# Altium PCB PCB4.PcbDoc (part 1 of 4)
Units mm, origin at the board's own origin, x right, y up, seen from the top; angles counter-clockwise.
Board outline 297 x 150 mm, 2 copper layers (Top Layer, Bottom Layer); 237 components, 147 nets, 681 pads, 111 vias.
Unrouted connection lines stored in the file: 7.
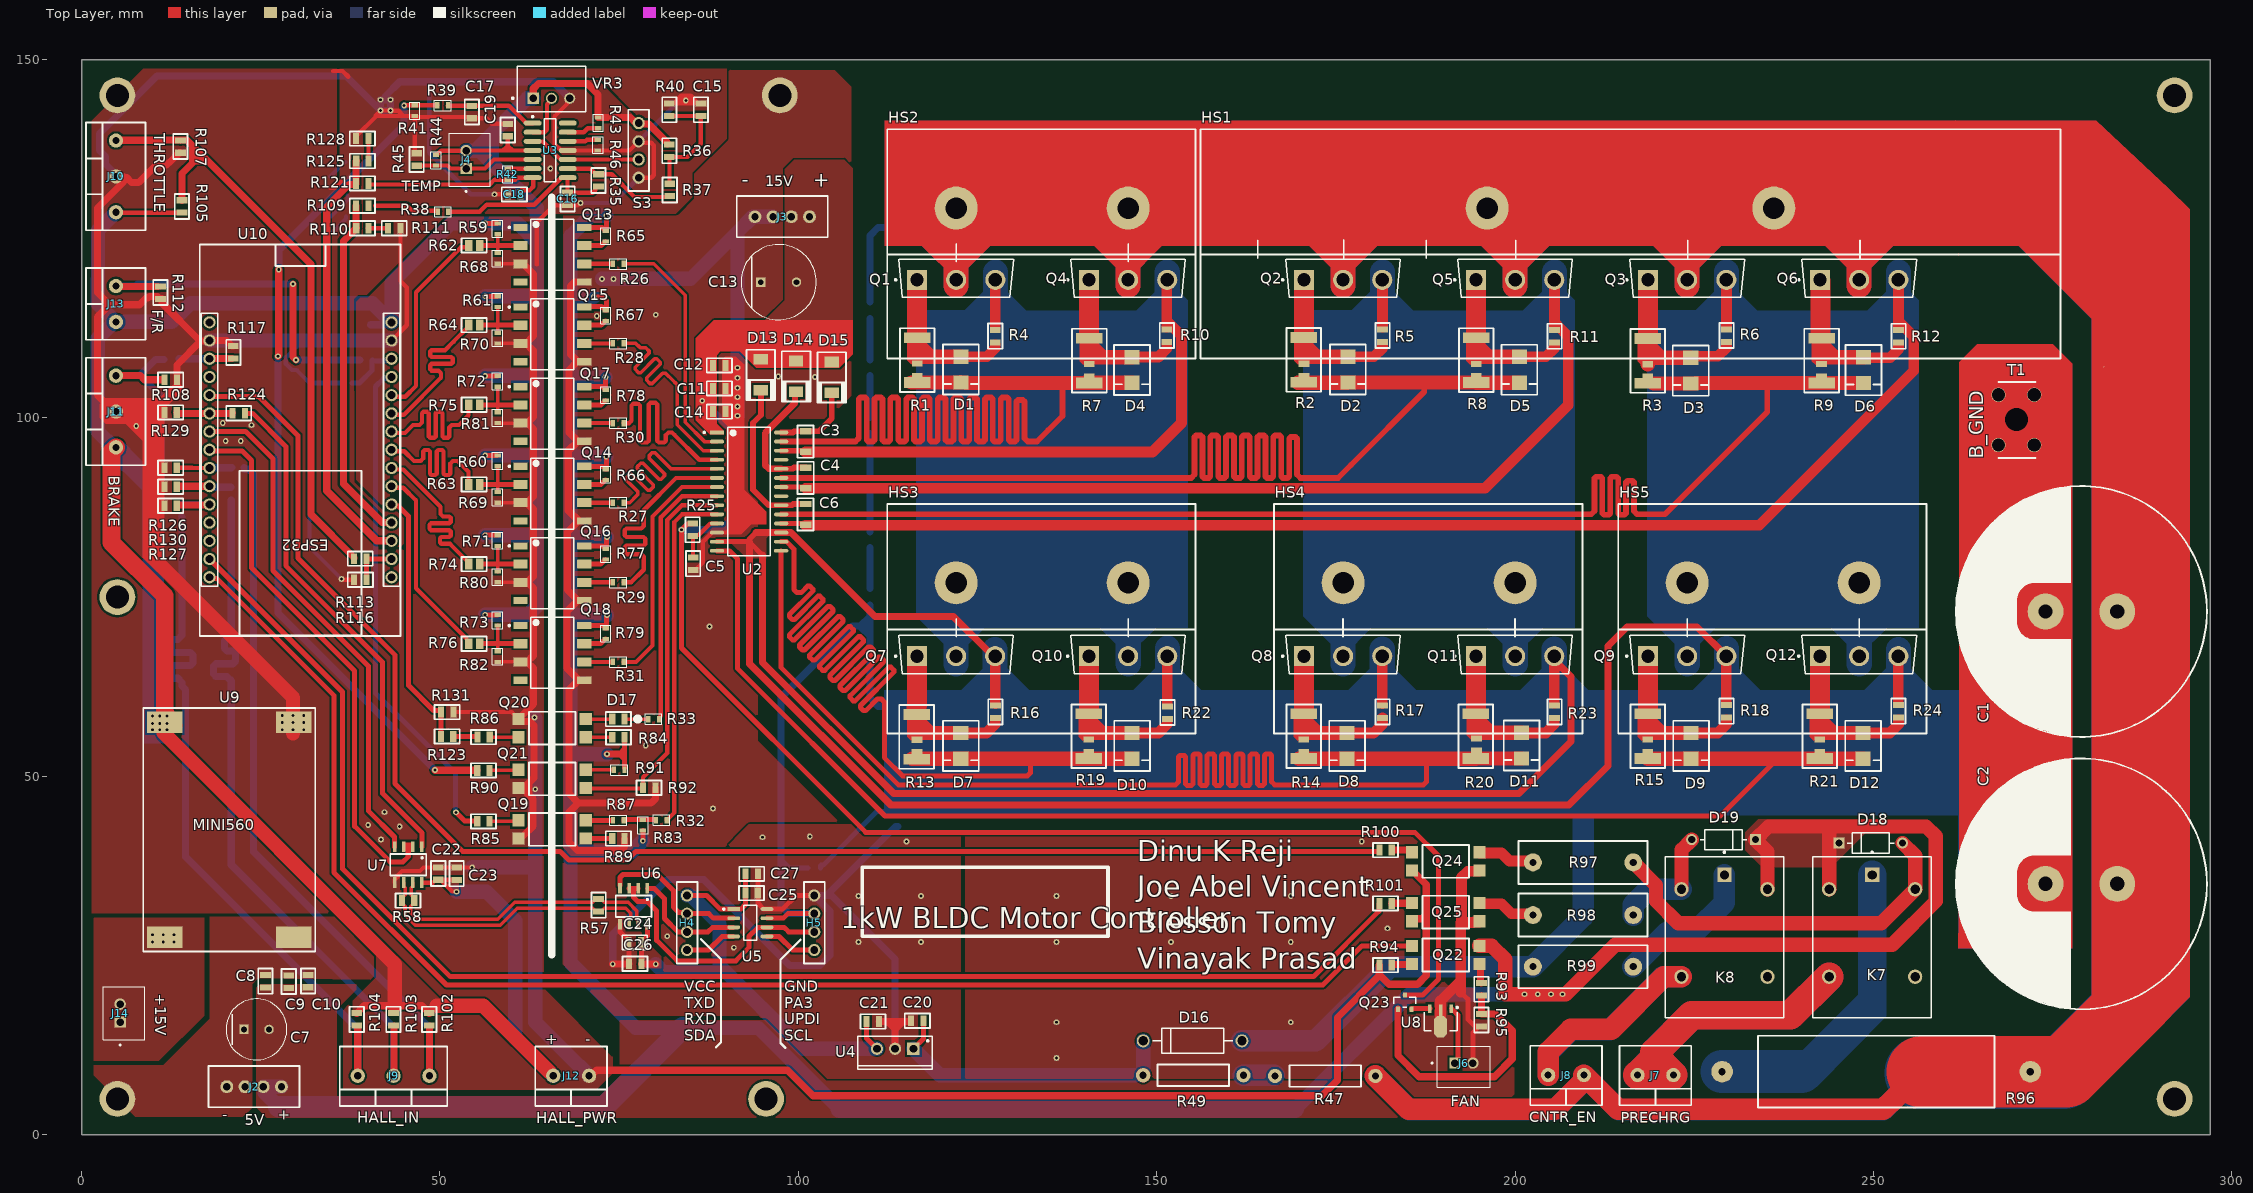
[diagram p0: Top Layer view]
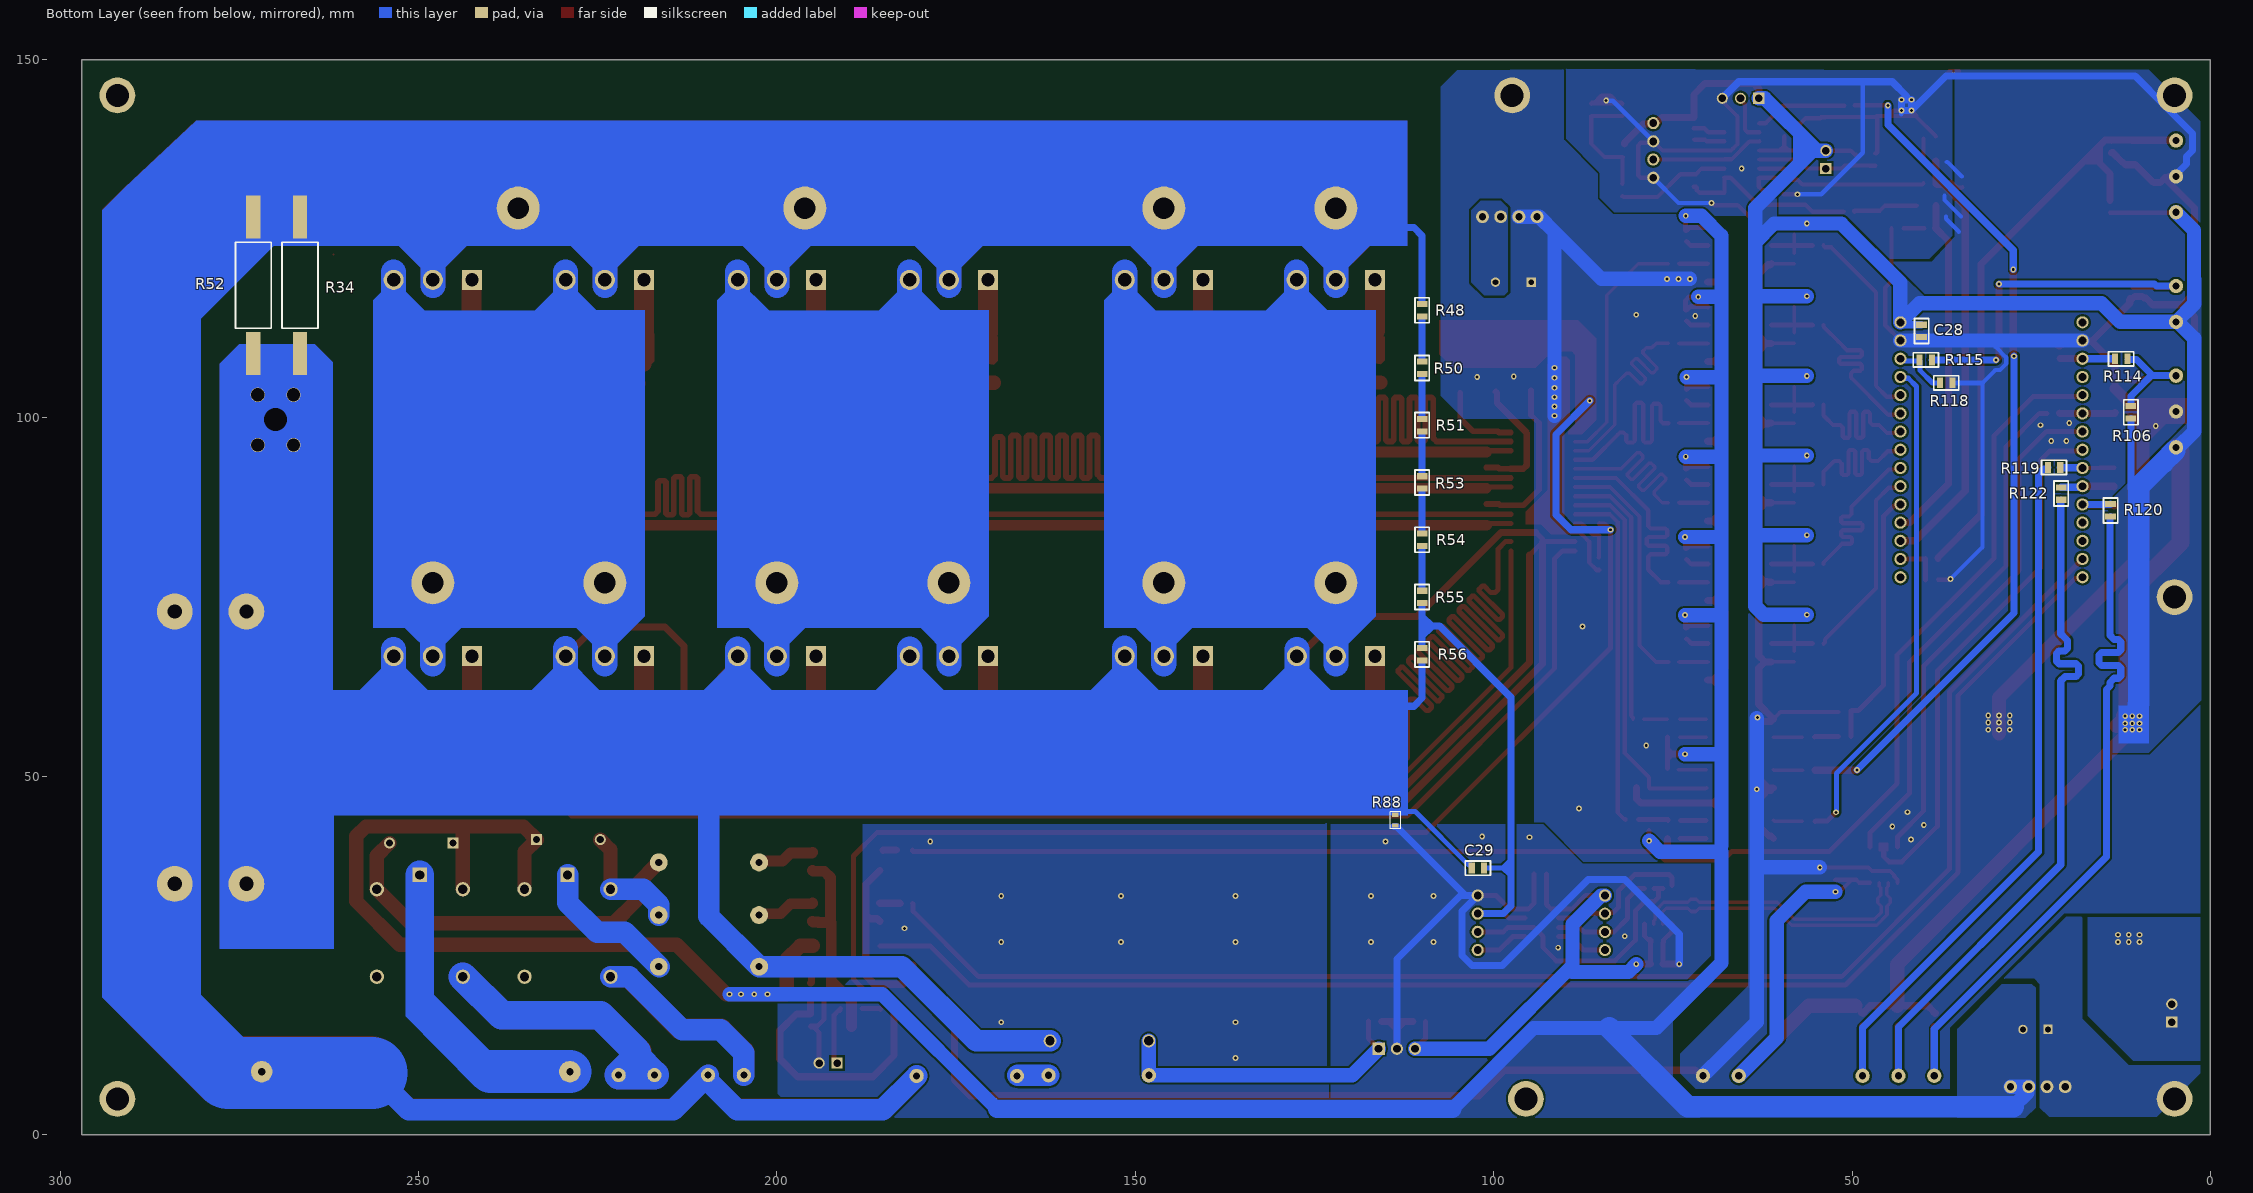
[diagram p1: Bottom Layer view, seen from below]

## Layer stack, top to bottom
Top Solder: solder mask 0.0102, Solder Resist, Dk 3.5
Top Layer: signal copper 0.0356
Dielectric 1: dielectric 0.32, FR-4, Dk 4.8
Bottom Layer: signal copper 0.0356
Bottom Solder: solder mask 0.0102, Solder Resist, Dk 3.5

## Board outline
0,0 0,150 297,150 297,0

## Design rules (kind name [scope] priority, off if disabled: settings)
Clearance [All] p1: gap=0.3 ignorepadtopadclearanceinfootprint=TRUE except(0: Arc-Hole Track-Hole SMDPad-Hole THPad-Hole Via-Hole Fill-Hole Poly-Hole Region-Hole Text-Hole; 0.254: Arc-Text Track-Text SMDPad-SMDPad SMDPad-THPad SMDPad-Via SMDPad-Text THPad-THPad THPad-Via THPad-Text Via-Via Via-Text Fill-Text Poly-Text Region-Text Text-Text)
DiffPairsRouting "Schematic Differential Pairs Routing" [InNetClass('RS485')] p1: maxlimit=0.4 minlimit=0.3 mostfreqgap=0.3 toplayer_minwidth=0.5 toplayer_maxwidth=0.6 toplayer_prefwidth=0.6 bottomlayer_minwidth=0.5 bottomlayer_maxwidth=0.6 bottomlayer_prefwidth=0.6 maxuncoupledlength=2
DiffPairsRouting [All] p2: maxlimit=0.254 minlimit=0.254 mostfreqgap=0.254 toplayer_minwidth=0.381 toplayer_maxwidth=0.381 toplayer_prefwidth=0.381 bottomlayer_minwidth=0.381 bottomlayer_maxwidth=0.381 bottomlayer_prefwidth=0.381 maxuncoupledlength=12.7
MatchedLengths "Schematic Matched Net Lengths_3" [InNetClass('HALL')] p1: tolerance=1 checknetsindiffpair=FALSE checkdiffpairvsdiffpair=TRUE checkxsignals=TRUE checkothers=TRUE
MatchedLengths "Schematic Matched Net Lengths_6" [InNetClass('PWM')] p2: tolerance=1 checknetsindiffpair=FALSE checkdiffpairvsdiffpair=TRUE checkxsignals=TRUE checkothers=TRUE
MatchedLengths "Schematic Matched Net Lengths_2" [InNetClass('PWM_IN')] p3: tolerance=1 checknetsindiffpair=FALSE checkdiffpairvsdiffpair=TRUE checkxsignals=TRUE checkothers=TRUE
MatchedLengths "Schematic Matched Net Lengths_1" [InNetClass('GATE_DRIVE')] p4: tolerance=0 checknetsindiffpair=FALSE checkdiffpairvsdiffpair=TRUE checkxsignals=TRUE checkothers=TRUE
MatchedLengths "Schematic Matched Net Lengths" [InNetClass('PWM_GD')] p5: tolerance=1 checknetsindiffpair=FALSE checkdiffpairvsdiffpair=TRUE checkxsignals=TRUE checkothers=TRUE
PlaneClearance [All] p1: clearance=0.6
PlaneConnect [All] p1: planeconnectstyle=Direct reliefexpansion=0.508 reliefentries=4 reliefconductorwidth=0.254 reliefairgap=0.254
PolygonConnect PolygonConnect_2 [All vs IsNamedPolygon('vcc_15v')] p1: connectstyle=Direct reliefconductorwidth=0.254 reliefentries=4 polygonreliefangle="90 Angle" airgapwidth=0.254
PolygonConnect PolygonConnect_1 [All vs IsNamedPolygon('Bottom Solder-No Net')] p2: connectstyle=Direct reliefconductorwidth=0.254 reliefentries=4 polygonreliefangle="90 Angle" airgapwidth=0.254
PolygonConnect [All] p3: connectstyle=Direct reliefconductorwidth=0.254 reliefentries=4 polygonreliefangle="90 Angle" airgapwidth=0.254
RoutingVias [All] p1: holewidth=0.4 width=0.8 viastyle="Through Hole" minholewidth=0.3 minwidth=0.5 maxholewidth=1 maxwidth=1.27
SolderMaskExpansion [All] p1: expansion=0.102 istentingtop=FALSE
Width [All] p1: maxlimit=10 minlimit=0.5 preferedwidth=1 minimp=50.000000 maximp=50.000000 favimp=50.000000
27 further rules are at their usual default settings.

## Classes and differential pairs
net class RS485: D_N D_P
net class HALL: HALL_1 HALL_2 HALL_3
net class PWM: HIN1_MCU HIN2_MCU HIN3_MCU LIN1_MCU LIN2_MCU LIN3_MCU
net class PWM_IN: HIN1 HIN2 HIN3 LIN1 LIN2 LIN3
net class PWM_GD: HIN1_GD HIN2_GD HIN3_GD LIN1_GD LIN2_GD LIN3_GD
net class GATE_DRIVE: H03 HO1 HO2 LO1 LO2 LO3
differential pair class RS485: D
component class Voltage_measurement: C20 C21 C22 C23 C24 C25 C26 C27 C29 D16 H4 H5 R47 R48 R49 R50 R51 R53 R54 R55 R56 R57 R58 R88 U4 U5 U6 U7
component class "Precharge circuit": D18 D19 J7 J8 J9 J10 J11 J12 J13 K7 K8 Q24 Q25 R96 R97 R98 R99 R100 R101 R102 R103 R104 R105 R106 R107 R108 R112
component class Optocouplers: Q13 Q14 Q15 Q16 Q17 Q18 R59 R60 R61 R62 R63 R64 R65 R66 R67 R68 R69 R70 R71 R72 R73 R74 R75 R76 R77 R78 R79 R80 R81 R82
component class optocouplers2: D17 J6 Q19 Q20 Q21 Q22 Q23 R83 R84 R85 R86 R87 R89 R90 R91 R92 R93 R94 R95 U8
component class mcu: C28 J14 R109 R110 R111 R113 R114 R115 R116 R117 R118 R119 R120 R121 R122 R123 R124 R125 R126 R127 R128 R129 R130 R131 U9 U10
component class HV_Side: C1 C2 D1 D2 D3 D4 D5 D6 D7 D8 D9 D10 D11 D12 HS1 HS2 HS3 HS4 HS5 Q1 Q2 Q3 Q4 Q5 Q6 Q7 Q8 Q9 Q10 Q11 Q12 R1 R2 R3 R4 R5 R6 R7 R8 R9 R10 R11 R12 R13 R14 R15 R16 R17 R18 R19 R20 R21 R22 R23 R24 R34 R52 T1
component class Gate_Driver: C3 C4 C5 C6 C7 C8 C9 C10 C11 C12 C13 C14 D13 D14 D15 J2 J3 R25 R26 R27 R28 R29 R30 R31 R32 R33 U2
component class Current_measurement: C15 C16 C17 C18 C19 J4 R35 R36 R37 R38 R39 R40 R41 R42 R43 R44 R45 R46 S3 U3 VR3
differential pair D: +D_P -D_N

## Components (designator, comment, footprint, x,y, rotation, side; value= is the part's Value field where it differs from the comment)
C1 "4700uF 100V" "4700uF 100V" 284,73 r180 top
C2 "4700uF 100V" "4700uF 100V" 284,35 r180 top
C3 "0.1uF 1206" C1206 101,96.71 r270 top
C4 "0.1uF 1206" C1206 101.025,91.63 r270 top
C5 "1uF 0805" R0805 85.325,79.675 r270 top
C6 "0.1uF 1206" C1206 101,86.55 r270 top
C7 "100uF 50v" FP-EEU-FR1H101B-MFG 24.4,14.7 r0 top
C8 "10uF 0805" R0805 25.65,21.425 r90 top
C9 "0.1uF 0805" R0805 28.9,21.375 r90 top
C10 "0.01uF 0805" R0805 31.6,21.45 r90 top
C11 "0.1uF 0805" R0805 88.975,104.112 r180 top
C12 "10uF 0805" R0805 88.975,107.325 r0 top
C13 "10uf THT" FP-RAD-TH-D_10_0_5-L_20_2-MFG 97.25,118.95 r0 top
C14 "0.01uF 0805" R0805 88.975,100.9 r0 top
C15 "0.01uF 0805" R0805 86.4,143 r90 top
C16 "0.1uF 0805" R0805 67.8,130.55 r270 top
C17 "0.1uF 0805" R0805 54.45,142.675 r270 top
C18 "0.1uF 0805" R0805 60.375,131.2 r180 top
C19 "0.01uF 0805" R0805 59.45,140.175 r90 top
C20 "0.33uF 0805" R0805 116.6,15.9 r180 top
C21 "0.1uF 0805" R0805 110.4,15.8 r0 top
C22 "0.01uF 0805" R0805 49.75,36.45 r90 top
C23 "0.1uF 0805" R0805 52.325,36.425 r90 top
C24 "0.01uF 0805" R0805 77.175,26.825 r180 top
C25 "0.01uF 0805" R0805 93.475,33.725 r0 top
C26 "0.1uF 0805" R0805 77.225,23.85 r180 top
C27 "0.1uF 0805" R0805 93.5,36.4 r0 top
C28 "10uF 0805" R0805 40.3,112.125 r270 bottom
C29 "0.01uF 0805" R0805 102.2,37.2 r0 bottom
D1 "SS34" DO-214AC 122.675,104.952 r90 top
D2 "SS34" DO-214AC 176.657,104.952 r90 top
D3 "SS34" DO-214AC 224.5,104.8 r90 top
D4 "SS34" DO-214AC 146.549,104.893 r90 top
D5 "SS34" DO-214AC 200.577,104.927 r90 top
D6 "SS34" DO-214AC 248.602,104.877 r90 top
D7 "SS34" DO-214AC 122.657,52.452 r90 top
D8 "SS34" DO-214AC 176.559,52.452 r90 top
D9 "SS34" DO-214AC 224.559,52.452 r90 top
D10 "SS34" DO-214AC 146.559,52.452 r90 top
D11 "SS34" DO-214AC 200.9,52.5 r90 top
D12 "SS34" DO-214AC 248.559,52.452 r90 top
D13 "SS510" DO-210AA 94.75,106.025 r90 top
D14 "SS510" DO-210AA 99.675,105.8 r90 top
D15 "SS510" DO-210AA 104.65,105.675 r90 top
D16 "1N5347BRLG" ONSC-SURMETIC40-2-017AA-01 155,13.1 r0 top
D17 "LED-0805" LED0805 74.9,57.995 r180 top
D18 "1N4007" FP-1N4007-MFG 249.6,40.7 r0 top value=15pF
D19 "1N4007" FP-1N4007-MFG 229.075,41.175 r180 top value=15pF
H4 "2.54mm 4p header" "2.54mm 4p header" 84.475,29.575 r0 top
H5 "2.54mm 4p header" "2.54mm 4p header" 102.225,29.58 r0 top
HS1 "Heatsink_L" heatsink_l 156.093,122.761 r0 top locked
HS2 "heatsink_S" haetsink_s 122.018,129.286 r180 top locked
HS3 "heatsink_S" haetsink_s 122.018,77 r180 top locked
HS4 "heatsink_S" haetsink_s 176,77 r180 top locked
HS5 "heatsink_S" haetsink_s 224,77 r180 top locked
J2 "5V" "JST PH-4A" 24.07,6.7 r180 top
J3 "PH-4A" "JST PH-4A" 97.745,128.075 r180 top
J4 "10k NTC" XH2.5-2p 53.667,134.78 r270 top
J6 "FAN" XH2.5-2p 191.58,9.983 r180 top
J7 "PRECHRG" TERMINAL_5MM_2P 219.575,8.325 r180 top
J8 "CNTR_EN" TERMINAL_5MM_2P 207.1,8.325 r180 top
J9 "HALL_IN" TERMINAL_5MM_3P 43.525,8.225 r180 top
J10 "THROTTLE" TERMINAL_5MM_3P 4.8,133.7 r90 top
J11 "BRAKE" TERMINAL_5MM_3P 4.8,100.9 r90 top
J12 "HALL_PWR" TERMINAL_5MM_2P 68.3,8.225 r180 top
J13 "F/R" TERMINAL_5MM_2P 4.8,115.9 r90 top
J14 "15V_VCC" XH2.5-2p 5.4,15.7 r270 top
K7 "5v/10A spdt" FP-G5LE-1-E-36-DC5-MFG 249.8,27.55 r90 top
K8 "5v/10A spdt" FP-G5LE-1-E-36-DC5-MFG 229.2,27.55 r90 top
Q1 "IRFP260NPBF" FP-PG-TO247-3-MFG 122.018,119.5 r90 top
Q2 "IRFP260NPBF" FP-PG-TO247-3-MFG 176,119.5 r90 top
Q3 "IRFP260NPBF" FP-PG-TO247-3-MFG 224,119.5 r90 top
Q4 "IRFP260NPBF" FP-PG-TO247-3-MFG 146,119.5 r90 top
Q5 "IRFP260NPBF" FP-PG-TO247-3-MFG 200,119.5 r90 top
Q6 "IRFP260NPBF" FP-PG-TO247-3-MFG 248,119.5 r90 top
Q7 "IRFP260NPBF" FP-PG-TO247-3-MFG 122,67 r90 top
Q8 "IRFP260NPBF" FP-PG-TO247-3-MFG 176,67 r90 top
Q9 "IRFP260NPBF" FP-PG-TO247-3-MFG 224,67 r90 top
Q10 "IRFP260NPBF" FP-PG-TO247-3-MFG 146,67 r90 top
Q11 "IRFP260NPBF" FP-PG-TO247-3-MFG 200,67 r90 top
Q12 "IRFP260NPBF" FP-PG-TO247-3-MFG 248,67 r90 top
Q13 "6N137-300E" FP-6N137-300E-MFG 65.675,122.777 r270 top
Q14 "6N137-300E" FP-6N137-300E-MFG 65.675,89.45 r270 top
Q15 "6N137-300E" FP-6N137-300E-MFG 65.675,111.668 r270 top
Q16 "6N137-300E" FP-6N137-300E-MFG 65.675,78.341 r270 top
Q17 "6N137-300E" FP-6N137-300E-MFG 65.675,100.559 r270 top
Q18 "6N137-300E" FP-6N137-300E-MFG 65.675,67.232 r270 top
Q19 "EL817S1" EL817S1 65.65,42.6 r0 top
Q20 "EL817S1" EL817S1 65.65,56.725 r180 top
Q21 "EL817S1" EL817S1 65.65,49.65 r0 top
Q22 "EL817S1" EL817S1 190.325,25.075 r0 top
Q23 "SI2300DS-T1-GE3" FP-S-03946-MFG 184.6,18.5 r90 top
Q24 "EL817S1" EL817S1 190.325,38.15 r0 top
Q25 "EL817S1" EL817S1 190.325,31.05 r0 top
R1 "1k 2512" R2512 116.586,108.077 r90 top
R2 "1k 2512" R2512 170.5,108.1 r90 top
R3 "1k 2512" R2512 218.5,107.975 r90 top
R4 "10k 0805" R0805 127.478,111.416 r90 top
R5 "10k 0805" R0805 181.5,111.5 r90 top
R6 "10k 0805" R0805 229.5,111.5 r90 top
R7 "1k 2512" R2512 140.6,108 r90 top
R8 "1k 2512" R2512 194.564,108.077 r90 top
R9 "1k 2512" R2512 242.75,108 r90 top
R10 "10k 0805" R0805 151.411,111.491 r90 top
R11 "10k 0805" R0805 205.5,111.4 r90 top
R12 "10k 0805" R0805 253.5,111.4 r90 top
R13 "1k 2512" R2512 116.5,55.5 r90 top
R14 "1k 2512" R2512 170.5,55.6 r90 top
R15 "1k 2512" R2512 218.5,55.6 r90 top
R16 "10k 0805" R0805 127.5,59 r90 top
R17 "10k 0805" R0805 181.5,59 r90 top
R18 "10k 0805" R0805 229.5,59.1 r90 top
R19 "1k 2512" R2512 140.5,55.6 r90 top
R20 "1k 2512" R2512 194.5,55.6 r90 top
R21 "1k 2512" R2512 242.5,55.6 r90 top
R22 "10k 0805" R0805 151.5,58.9 r90 top
R23 "10k 0805" R0805 205.5,59 r90 top
R24 "10k 0805" R0805 253.475,59.1 r90 top
R25 "1K 0805" R0805 85.25,84.405 r270 top
R26 "0R 0603" R0603 74.875,121.507 r0 top
R27 "0R 0603" R0603 74.875,88.18 r0 top
R28 "0R 0603" R0603 74.875,110.398 r0 top
R29 "0R 0603" R0603 74.875,77.071 r0 top
R30 "0R 0603" R0603 74.875,99.289 r0 top
R31 "0R 0603" R0603 74.875,65.962 r0 top
R32 "0R 0603" R0603 80.9,43.9 r0 top
R33 "0R 0603" R0603 79.8,57.995 r0 top
R34 "Bleeder" "1W Modified THT" 266.519,118.514 r0 bottom
R35 "3k 0805" R0805 72.1,133.125 r270 top
R36 "12k 0805" R0805 82,137.275 r90 top
R37 "20k 0805" R0805 82.05,131.8 r270 top
R38 "0R 0603" R0603 50.425,128.775 r180 top
R39 "0R 0603" R0603 50.375,143.6 r180 top
R40 "10k 0805" R0805 82,143 r270 top
R41 "0R 0603" R0603 46.475,142.875 r90 top
R42 "0R 0603" R0603 59.45,134 r270 top
R43 "0R 0603" R0603 72.075,141.175 r90 top
R44 "0R 0603" R0603 49.45,135.975 r90 top
R45 "10k 0805" R0805 46.75,136.05 r270 top
R46 "0R 0603" R0603 72.025,138.075 r270 top
R47 "100R 1W THT" "1W THT" 173.5,8.2 r180 top
R48 "20k 0805" R0805 109.975,115.025 r90 bottom
R49 "100R 1W THT" "1W THT" 155.1,8.3 r0 top
R50 "20k 0805" R0805 109.975,106.983 r270 bottom
R51 "20k 0805" R0805 109.975,98.992 r90 bottom
R52 "Bleeder" "1W Modified THT" 273.044,118.514 r0 bottom
R53 "20k 0805" R0805 109.975,91 r270 bottom
R54 "10k 0805" R0805 109.975,83.008 r270 bottom
R55 "5.1k 0805" R0805 109.975,75.017 r270 bottom
R56 "5.1k 0805" R0805 109.975,67.025 r90 bottom
R57 "120R 0805" R0805 72.125,32.025 r90 top
R58 "120R 0805" R0805 45.55,32.675 r0 top
R59 "0R 0603" R0603 58.05,126.375 r90 top
R60 "0R 0603" R0603 58.05,94.01 r90 top
R61 "0R 0603" R0603 58.05,116.228 r90 top
R62 "180R 0402" R08050402 54.759,124.077 r0 top
R63 "180R 0402" R08050402 54.759,90.732 r0 top
R64 "180R 0402" R08050402 54.759,112.962 r0 top
R65 "0R 0603" R0603 73.125,125.377 r90 top
R66 "0R 0603" R0603 73.125,92.107 r90 top
R67 "0R 0603" R0603 73.125,114.287 r90 top
R68 "0R 0603" R0603 58.05,122.257 r90 top
R69 "0R 0603" R0603 58.05,88.93 r90 top
R70 "0R 0603" R0603 58.05,111.148 r90 top
R71 "0R 0603" R0603 58.05,82.901 r90 top
R72 "0R 0603" R0603 58.05,105.119 r90 top
R73 "0R 0603" R0603 58.05,71.792 r90 top
R74 "180R 0402" R08050402 54.759,79.617 r0 top
R75 "180R 0402" R08050402 54.759,101.847 r0 top
R76 "180R 0402" R08050402 54.759,68.502 r0 top
R77 "0R 0603" R0603 73.125,81.017 r90 top
R78 "0R 0603" R0603 73.125,103.197 r90 top
R79 "0R 0603" R0603 73.125,69.927 r90 top
R80 "0R 0603" R0603 58.05,77.821 r90 top
R81 "0R 0603" R0603 58.05,100.039 r90 top
R82 "0R 0603" R0603 58.05,66.712 r90 top
R83 "0R 0603" R0603 78.3,43.2 r270 top
R84 "10k 0805" R0805 74.909,55.455 r0 top
R85 "100R 0805" R0805 56.075,43.725 r0 top
R86 "150R 0805" R0805 56.075,55.475 r180 top
R87 "0R 0603" R0603 74.891,43.87 r0 top
R88 "R0603" R0603 113.7,43.9 r270 bottom
R89 "200R 0805" R0805 74.891,41.33 r180 top
R90 "100R 0805" R0805 56.075,50.825 r0 top
R91 "0R 0603" R0603 75,50.9 r0 top
R92 "200R 0805" R0805 79.175,48.4 r180 top
R93 "1K 0805" R0805 195.3,20.3 r270 top
R94 "100R 0805" R0805 181.925,23.675 r0 top
R95 "10k 0805" R0805 195.3,16 r90 top
R96 "10k 10W THT" R10W 250.375,8.8 r0 top
R97 "220R 1W THT" R1WTHT 209.475,38 r0 top
R98 "220R 1W THT" R1WTHT 209.475,30.65 r0 top
R99 "220R 1W THT" R1WTHT 209.475,23.45 r0 top
R100 "100R 0805" R0805 181.925,39.725 r0 top
R101 "100R 0805" R0805 181.925,32.275 r0 top
R102 "10k 0805" R0805 48.5,16.1 r90 top
R103 "10k 0805" R0805 43.5,16.1 r90 top
R104 "10k 0805" R0805 38.4,16.1 r90 top
R105 "10k 0805" R0805 14,129.5 r270 top
R106 "10k 0805" R0805 11.1,100.8 r270 bottom
R107 "10k 0805" R0805 13.8,137.875 r90 top
R108 "10k 0805" R0805 12.425,105.325 r180 top
R109 "3.3k 0805" R0805 39.175,129.6 r0 top
R110 "3.3k 0805" R0805 39.175,126.475 r180 top
R111 "3.3k 0805" R0805 43.625,126.475 r180 top
R112 "10k 0805" R0805 11,117.5 r90 top
R113 "3.3k 0805" R0805 38.875,80.375 r180 top
R114 "3.3k 0805" R0805 12.45,108.25 r180 bottom
R115 "3.3k 0805" R0805 39.7,108.1 r180 bottom
R116 "3.3k 0805" R0805 38.893,77.425 r0 top
R117 "3.3k 0805" R0805 21.175,109.15 r270 top
R118 "3.3k 0805" R0805 36.85,104.9 r0 bottom
R119 "10k 0805" R0805 21.825,93.1 r0 bottom
R120 "10k 0805" R0805 13.925,87.1 r270 bottom
R121 "3.3k 0805" R0805 39.175,132.725 r0 top
R122 "10k 0805" R0805 20.825,89.45 r270 bottom
R123 "3.3k 0805" R0805 51,55.575 r0 top
R124 "1K 0805" R0805 21.925,100.65 r0 top
R125 "3.3k 0805" R0805 39.175,135.85 r180 top
R126 "10k 0805" R0805 12.425,93.05 r0 top
R127 "10k 0805" R0805 12.425,87.75 r0 top
R128 "3.3k 0805" R0805 39.175,138.975 r0 top
R129 "1K 0805" R0805 12.425,100.775 r0 top
R130 "10k 0805" R0805 12.425,90.4 r0 top
R131 "3.3k 0805" R0805 51,58.975 r180 top
S3 "WCS1600" "2.54mm 4p header" 77.725,137.325 r0 top
T1 "B_GND" "7701 Terminal" 269.925,99.725 r0 top
U2 "IR2136SPBF" FP-PG-DSO-28-IPC_C 93.125,89.725 r0 top
U3 "MCP6004-I/SL" SOIC-SL14_M 65.375,137.325 r0 top
U4 "L7805CV" TO220 113.5,12 r180 top
U5 "ATTINY402-SSNR" FP-C04-057-SWB-IPC_C 93.3,29.575 r0 top
U6 "TP8485" TP8485 77.025,31.875 r180 top
U7 "TP8485" TP8485 45.575,37.675 r180 top
U8 "L78L12A" SOT-89_L 189.6,15.9 r270 top
U9 "MINI560" MINI560 20.6,42.55 r90 top
U10 "ESP32" esp32 30.55,95.56 r180 top locked
VR3 "10k pot" BOUR-3299W-3_V 65.56,145.89 r0 top

## Footprints (in the part's own frame and the unit in brackets; to place one, negate y for a bottom-side part, rotate by r counter-clockwise, add the part's x,y. Pads: shape width x height; smd on the part's side, far side on the other; paste and mask are expansions set on the pad)
"1W Modified THT" [mm]
  rect 2x6 smd: 1(0,9.5) 2(0,-9.5)
  silkscreen extent -2.5,-6 2.5,6
"1W THT" [mm]
  round 2 hole 1: 1(-7,0) 2(7,0)
  silkscreen extent -5,-1.5 5,1.5
"2.54mm 4p header" [mm]
  round 1.7 hole 1.1: 1(0,3.81) 2(0,1.27) 3(0,-1.27) 4(0,-3.81)
  silkscreen extent -1.45,-5.68 1.45,5.68
"4700uF 100V" [mm]
  round 5 hole 2: 1(0,0) 2(10,0)
  silkscreen extent -12.5,-17.5 22.5,17.5
"7701 Terminal" [mm]
  round 2 hole 1.85: 1(-2.5,-3.5) 1(2.5,-3.5) 1(2.5,3.5)
  round 2 hole 1.85 paste+0 mask+0.102: 1(-2.5,3.5)
  round 1.524 hole 3.2: 1(0.025,0.05)
  Top Layer region: -4,-5 4,-5 4,5 -4,5
  Bottom Layer region: -4,-5 4,-5 4,5 -4,5
  silkscreen extent -2.5,-5.3 2.65,5.3
BOUR-3299W-3_V [mm] "TH, 3-Leads, Body 9.53x6.4mm, Pitch 2.54mm"
  rect 1.55x1.55 hole 1.05: 1(-2.54,-1.29)
  round 1.55 hole 1.05: 2(0,-1.29) 3(2.54,-1.29)
  silkscreen extent -5.54,-3.2 4.76,3.2, body extent -4.76,-3.2 4.76,3.2, height 11.55
C1206 [mm] "1206 Package"
  rect 0.9x1.6 smd: 1(-1.45,0) 2(1.45,0)
  silkscreen extent -2.25,-1.12 2.25,1.13
DO-210AA [mm] "DO-210AA Package"
  rect 1.5x2 smd: 1(-2.15,0) 2(2.15,0)
  silkscreen extent -3.5,-2 3.5,2
DO-214AC [mm] "SMA"
  rect 2x2.1 smd: 1(0,0) 2(3.6,0)
  silkscreen extent -1.7,-2.5 5.3,2.5
EL817S1 [mm] "Optocoupler"
  rect 1.68x1.71 smd: 1(-4.69,1.27) 2(-4.69,-1.27) 3(4.69,-1.27) 4(4.69,1.27)
  silkscreen extent -3.25,-2.29 3.25,2.29
esp32 [mm]
  round 1.7 hole 1.1: 1(-12.7,17.78) 2(-12.7,15.24) 3(-12.7,12.7) 4(-12.7,10.16) 5(-12.7,7.62) 6(-12.7,5.08) 7(-12.7,2.54) 8(-12.7,0) 9(-12.7,-2.54) 10(-12.7,-5.08) 11(-12.7,-7.62) 12(-12.7,-10.16) 13(-12.7,-12.7) 14(-12.7,-15.24) 15(-12.7,-17.78) 16(12.7,-17.78) 17(12.7,-15.24) 18(12.7,-12.7) 19(12.7,-10.16) 20(12.7,-7.62) 21(12.7,-5.08) 22(12.7,-2.54) 23(12.7,0) 24(12.7,2.54) 25(12.7,5.08) 26(12.7,7.62) 27(12.7,10.16) 28(12.7,12.7) 29(12.7,15.24) 30(12.7,17.78)
  silkscreen extent -13.92,-28.65 14.08,25.98
FP-1N4007-MFG [mm]
  rect 1.55x1.55 hole 1 paste-1000 mask+0: 1(-4.44,0)
  round 1.55 hole 1 paste-1000 mask+0: 2(4.44,0)
  silkscreen extent -3.26,-1.4 3.26,1.4, body extent -5.32,-1.5 5.32,1.5, height 0.25
FP-6N137-300E-MFG [mm]
  rect 1.016x2 smd paste+0 mask+0: 1(-3.81,-4.45) 4(3.81,-4.45) 5(3.81,4.45) 8(-3.81,4.45)
  rect 1.27x2 smd paste+0 mask+0: 2(-1.27,-4.45) 3(1.27,-4.45) 6(1.27,4.45) 7(-1.27,4.45)
  silkscreen extent -4.95,-6.12 4.95,3, body extent -5.05,-5.55 5.05,5.55, height 0.25
FP-C04-057-SWB-IPC_C [mm]
  rect 1.777x0.542 smd paste+0 mask+0: 1(-2.318,1.905)
  rrect100% 1.777x0.542 smd paste+0 mask+0: 2(-2.318,0.635) 3(-2.318,-0.635) 4(-2.318,-1.905) 5(2.318,-1.905) 6(2.318,-0.635) 7(2.318,0.635) 8(2.318,1.905)
  silkscreen extent -3.83,-2.45 0.93,2.45, body extent -3.31,-2.55 3.31,2.55, height 0.25
FP-EEU-FR1H101B-MFG [mm]
  rect 1.3x1.3 hole 0.8 paste-1000 mask+0: 1(-1.75,0)
  round 1.3 hole 0.8 paste-1000 mask+0: 2(1.75,0)
  silkscreen extent -4.25,-4.25 4.25,4.25, body extent -4.35,-4.35 4.35,4.35, height 0.25
FP-G5LE-1-E-36-DC5-MFG [mm]
  rect 2x2 hole 1.3 paste-1000 mask+0: 1(8.7,0)
  round 2 hole 1.3 paste-1000 mask+0: 2(6.7,6) 3(-5.5,6) 4(-5.5,-6) 5(6.7,-6)
  silkscreen extent -11.25,-8.25 11.97,8.25, body extent -11.35,-8.35 11.35,8.35, height 0.25
FP-PG-DSO-28-IPC_C [mm]
  rect 1.998x0.527 smd paste+0 mask+0: 1(-4.478,8.255)
  rrect100% 1.998x0.527 smd paste+0 mask+0: 2(-4.478,6.985) 3(-4.478,5.715) 4(-4.478,4.445) 5(-4.478,3.175) 6(-4.478,1.905) 7(-4.478,0.635) 8(-4.478,-0.635) 9(-4.478,-1.905) 10(-4.478,-3.175) 11(-4.478,-4.445) 12(-4.478,-5.715) 13(-4.478,-6.985) 14(-4.478,-8.255) 15(4.478,-8.255) 16(4.478,-6.985) 17(4.478,-5.715) 18(4.478,-4.445) 19(4.478,-3.175) 20(4.478,-1.905) 21(4.478,-0.635) 22(4.478,0.635) 23(4.478,1.905) 24(4.478,3.175) 25(4.478,4.445) 26(4.478,5.715) 27(4.478,6.985) 28(4.478,8.255)
  silkscreen extent -6.38,-8.95 2.98,8.95, body extent -5.58,-9.05 5.58,9.05, height 0.25
FP-PG-TO247-3-MFG [mm]
  rect 2.8x2.8 hole 1.85 paste-1000 mask+0: 1(-0.228,5.46)
  round 2.8 hole 1.85 paste-1000 mask+0: 2(-0.228,0) 3(-0.228,-5.46)
  silkscreen extent -2.66,-8 2.66,8.56, body extent -2.76,-8.16 2.76,8.16, height 0.25
FP-RAD-TH-D_10_0_5-L_20_2-MFG [mm]
  rect 1.3x1.3 hole 0.8 paste-1000 mask+0: 1(-2.5,0)
  round 1.3 hole 0.8 paste-1000 mask+0: 2(2.5,0)
  silkscreen extent -5.25,-5.25 5.25,5.25, body extent -5.35,-5.35 5.35,5.35, height 0.25
FP-S-03946-MFG [mil]
  rect 29x22 smd paste+0 mask+0: 1(-39,37.5) 2(-39,-37.5) 3(39,0)
  silkscreen extent -28,-60 28,60, body extent -57,-64 57,64, height 10
haetsink_s [mm]
  round 6 hole 3: 1(-24,0) 1(0,0)
  silkscreen extent -33.38,-11 9.62,21
heatsink_l [mm]
  round 6 hole 3: 1(40,6.525) 1(80,6.525)
  Top Layer lines w0.254: 105.75,0.05 105.8,0.05
  silkscreen extent 0,-14.47 120,17.53
"JST PH-4A" [mm]
  round 1.8 hole 1: 1(-3.81,0) 2(-1.27,0) 3(1.27,0) 4(3.81,0)
  silkscreen extent -6.35,-2.88 6.35,2.88
LED0805 [mm] "LED 0805 Package"
  rect 0.85x1.5 smd: 1(-0.866,0) 2(0.866,0)
  silkscreen extent -2.82,-1 1.76,1
MINI560 [mm]
  rect 3x5 smd: 1(-15,9) 2(-15,-9) 3(15,9) 4(15,-9)
  silkscreen extent -17,-12 17,12
ONSC-SURMETIC40-2-017AA-01 [mm] "AXIAL, 2-Leads, Diameter 3.49mm"
  round 1.8 hole 1.3: 1(-6.887,0) 2(6.887,0)
  silkscreen extent -5.59,-1.75 5.59,1.75
R1WTHT [mm] "1Watt THT Resistor"
  round 2.5 hole 1: 1(-7,0) 2(7,0)
  silkscreen extent -9,-3 9,3
R10W [mm]
  round 3 hole 1: 1(-21.5,0) 2(21.5,0)
  silkscreen extent -16.5,-5 16.5,5
R0603 [mm] "0603 Package"
  rect 0.6x0.9 smd mask+0.102: 1(-0.75,0) 2(0.75,0)
  silkscreen extent -1.17,-0.72 1.18,0.72
R0805 [mm] "0805 Package"
  rect 0.85x1.5 smd: 1(-0.875,0) 2(0.857,0)
  silkscreen extent -1.75,-1 1.75,1
R2512 [mm] "2512 Package"
  rect 1.5x3.7 smd: 1(-3.125,0) 2(3.125,0)
  silkscreen extent -4.44,-2.41 4.44,2.41
R08050402 [mm] "MOdified 0805"
  rect 1.05x1.5 smd: 1(-0.766,0) 2(0.766,0)
  silkscreen extent -1.74,-1 1.76,1
SOIC-SL14_M [mm] "SOIC, 14-Leads, Body 8.7x3.9mm, Pitch 1.27mm, IPC Low Density"
  oval 2.5x0.7 smd: 1(-2.45,3.81) 2(-2.45,2.54) 3(-2.45,1.27) 4(-2.45,0) 5(-2.45,-1.27) 6(-2.45,-2.54) 7(-2.45,-3.81) 8(2.45,-3.81) 9(2.45,-2.54) 10(2.45,-1.27) 11(2.45,0) 12(2.45,1.27) 13(2.45,2.54) 14(2.45,3.81)
  silkscreen extent -2.57,-4.4 0.8,4.83, body extent -2,-4.38 2,4.38, height 1.75
SOT-89_L [mm] "SOT89, 3-Leads, Body 4.5x2.4 mm, Pitch 1.5mm, Lead Span 4.1mm, IPC High Density"
  rect 1.2x0.5 smd: 1(-1.7,1.5) 3(-1.7,-1.5)
  rect 1.6x0.5 smd: 2(-1.5,0)
  oct 3x1.8 smd: 2(0.8,0)
  silkscreen extent -1.97,-2.3 1.4,2.43, body extent -1.2,-2.3 1.4,2.3, height 1.6
TERMINAL_5MM_2P [mm] "5mm screw terminal"
  round 2 hole 1: 1(2.5,0) 2(-2.5,0)
  silkscreen extent -5,-4.1 5,4.2
TERMINAL_5MM_3P [mm] "5mm screw terminal"
  round 2 hole 1: 1(5,0) 2(0,0) 2(0,0) 3(-5,0)
  silkscreen extent -7.5,-4.1 7.5,4.2
TO220 [mm] "TO, Thru-Hole, Vertical, Heatsink Mounted; 3 In-Line Leads; Pitch 2.54 mm"
  rect 1.7x1.7 hole 1.1: 1(-2.54,0)
  round 1.7 hole 1.1: 2(0,0) 3(2.54,0)
  silkscreen extent -5.2,-1.75 5.2,2.85, body extent -5.25,-1.8 5.25,2.9, height 19.7
TP8485 [mm]
  rect 0.5x1.5 smd: 1(-1.905,-2.5) 2(-0.635,-2.5) 3(0.635,-2.5) 4(1.905,-2.5) 5(1.905,2.5) 6(0.635,2.5) 7(-0.635,2.5) 8(-1.905,2.5)
  silkscreen extent -2.5,-1.5 2.5,1.5
XH2.5-2p [mm]
  rect 1.575x1.575 / inner round 1.575 / far side rect 1.575x1.575 hole 1.05: 1(-0.02,-0.017)
  round 1.575 hole 1.05: 2(-2.52,-0.017)
  silkscreen extent -4.97,-2.37 3.27,3.38, body extent -4.97,-2.37 2.43,3.38, height 7

## Part data
C1 C2: "4700uF 100V Electrolytic Capacitor", ComponentLink1Description="Product URL", ComponentLink1URL=https://sharvielectronics.com/product/4700uf-100v-electrolytic-capacitor/, ComponentLink2Description=Datasheet, Price per piece=185
C3 C4 C6: "0.1uF/100nF 50V Capacitor ±10% Tolerance CC1206KRX7R9BB104 – 1206 Package", Datasheet=https://sharvielectronics.com/wp-content/uploads/2020/09/Yageo-smd-Capacitor.pdf, Price per piece=2.22, Product URL=https://sharvielectronics.com/product/0-1uf-100nf-50v-capacitor-%c2%b110-tolerance-cc1206krx7r9bb104-1206-package/
C5: "1uF/1000nF 50V Capacitor ±10% Tolerance CC0805KKX7R9BB105 – 0805 Package", Datasheet=https://drive.google.com/file/d/1wr2K_YaGqgMtACeU2pC6RWLSxDMrIPxr/view?usp=sharing, Price per piece=2.16, Product URL=https://sharvielectronics.com/product/1uf-1000nf-50v-capacitor-%c2%b110-tolerance-cc0805kkx7r9bb105-0805-package/
C7: library part CMP-05427-000020-1, "100uF 50V Electrolytic Capacitor – JWCO", Capacitance=100uF, Case/Package=Radial, ESR (Equivalent Series Resistance)=61mR, Max Operating Temperature=105°C, Min Operating Temperature=-40°C, Package Quantity=1, Ripple Current=870mA, Tolerance=20%, Voltage Rating=50V, Contact Plating=Tin, Datasheet=https://drive.google.com/file/d/1y5PJPaMvWZ3P4wiieSg8-_Hf04MAZeNc/view?usp=sharing, Diameter=8mm, Features="General Purpose", Height=11.5mm, Height - Seated (Max)=0.512inch, Impedance=61mR, Lead Diameter=0.6mm, Lead Free="Lead Free", Lead Pitch=5mm, Length=11.5mm, Life (Hours)=6000Hour, Mount="Through Hole", Packaging="Tape and Reel", Price per piece=4.75, Product URL=https://sharvielectronics.com/product/100uf-50v-electrolytic-capacitor-jwco/, Radiation Hardening=No, REACH SVHC="No SVHC", RoHS Compliant=Yes, Series=FR, Termination=Radial, Voltage Rating (DC)=50V
C8 C12 C28: "10uF/1000nF 50V Capacitor ±10% Tolerance CC0805KKX5R9BB106 – 0805 Package", Datasheet=https://drive.google.com/file/d/1wr2K_YaGqgMtACeU2pC6RWLSxDMrIPxr/view?usp=sharing, Price per piece=2.85, Product URL=https://sharvielectronics.com/product/10uf-1000nf-50v-capacitor-%c2%b110-tolerance-cc0805kkx5r9bb106-0805-package/
C9 C11 C16 C17 C18 C21 C23 C26 C27: "0.1uF/100nF 100V Capacitor ±10% Tolerance CC0805KKX7R0BB104 – 0805 Package", Datasheet=https://drive.google.com/file/d/1wr2K_YaGqgMtACeU2pC6RWLSxDMrIPxr/view?usp=sharing, Price per piece=4.76, Product URL=https://sharvielectronics.com/product/0-1uf-100nf-100v-capacitor-%c2%b110-tolerance-cc0805kkx7r0bb104-0805-package/
C10 C14 C15 C19 C22 C24 C25 C29: "10nF/0.01uF 50V Capacitor ±10% Tolerance 0805B103K500CT – 0805 Package", Datasheet=https://drive.google.com/file/d/18RHnvRuuuVekgJyOA4l8O3UUaSpuKbHR/view?usp=sharing, Price per piece=2.45, Product URL=https://sharvielectronics.com/product/10nf-0-01uf-50v-capacitor-%c2%b110-tolerance-0805b103k500ct-0805-package/
C13: library part CMP-05427-000384-1, "Aluminum Electrolytic Capacitors (Radial Lead Type) 10uF ±20% 350V", Capacitance=10uF, Case/Package=Radial, Max Operating Temperature=105°C, Min Operating Temperature=-25°C, Package Quantity=200, Ripple Current=82mA, Tolerance=20%, Voltage Rating=350V, Construction=RADIAL, Contact Plating=Tin, Datasheet=https://drive.google.com/file/d/1s8SUY3P6K0bBIcG8WC2zo0Wz7jUZ4bD_/view?usp=sharing, Diameter=10mm, Height=20mm, Height - Seated (Max)=0.866inch, Lead Diameter=0.6mm, Lead Pitch=5mm, Lead/Base Style=Straight, Length=20mm, Life (Hours)=2000Hour, Mount="Through Hole", Packaging=Bulk, Price per piece=2.25, Product URL=https://sharvielectronics.com/product/10uf-35v-electrolytic-capacitor-105c-5x11mm-samwha/, Radiation Hardening=No, REACH SVHC="No SVHC", Ripple Current (AC)=82mA, RoHS Compliant=Yes, Series=NHG, Termination=Radial, Voltage Rating (DC)=350V
C20: library part "0.1uF 0805", "0.33uF/330nF 50V Capacitor ±10% Tolerance CC0805KKX7R9BB334 – 0805 Package", Datasheet=https://drive.google.com/file/d/1wr2K_YaGqgMtACeU2pC6RWLSxDMrIPxr/view?usp=sharing, Price per piece=2.78, Product URL=https://sharvielectronics.com/product/0-33uf-330nf-50v-capacitor-%C2%B110-tolerance-cc0805kkx7r9bb334-0805-package/
D1 D2 D3 D4 D5 D6 D7 D8 D9 D10 D11 D12: "SS34 SMA 40V/3A Schottky Diode SMD Package-DO-214AC", Forward Current=3A, Manufacturer="Vishay Semiconductors", Manufacturer Part Number=SS34-E3/57T, Max Junction Temp=+150°C, Max Repetitive Reverse Voltage=40V, Max Surge Forward Current=100A, Package=95402, Peak Reverse Current=0.5mA, Temperature="-55°C to +150°C", Temperature Range Low=-55°C, Automotive=No, Category=Diode, ComponentLink2Description=Datasheet, ComponentLink2URL=http://www.vishay.com/docs/88751/ss32.pdf, Datasheet=https://drive.google.com/file/d/1NCTjjzsUDglehHYd-VxKcrmaXziByLRA/view?usp=sharing, Device Class L1="Discrete Semiconductors", Device Class L2=Diodes, Device Class L3="Schottky Diodes", Digikey Description="DIODE SCHOTTKY 40V 3A DO214AB", Footprint Url=http://www.vishay.com/docs/95402/smc.pdf, Height=2.62mm, Lead Free=Yes, Mouser Description="Schottky Diodes & Rectifiers 3.0 Amp 40 Volt", Octopart=https://octopart.com/ss34-e3%2F57t-vishay-39552907, Price per piece=5.75, Product URL=https://sharvielectronics.com/product/ss34-sma-40v-3a-schottky-diode-smd-package-do-214ac/, RoHS=TRUE, Standoff Height=0mm, Temperature Range High=+150°C
D13 D14 D15: "SS510-E3/52T – 100V 5A High Voltage Schottky Diode – DO-214AA Package", Datasheet=https://drive.google.com/file/d/1iz5AYn44Er0kaCDKeIane-7fZ44xILG8/view?usp=sharing, Price per piece=12.75, Product URL=https://sharvielectronics.com/product/ss510-e3-52t-100v-5a-high-voltage-schottky-diode-do-214aa-package/
D16: library part CMP-1060-01277-1, "5 W Zener Voltage Regulator, 2-Pin Surmetic(TM) 40, Pb-Free, Tape and Reel", Manufacturer="On Semiconductor", ComponentLink1Description="Manufacturer URL", ComponentLink1URL=http://www.onsemi.com/, ComponentLink2Description=Datasheet, ComponentLink2URL=http://www.onsemi.cn/pub_link/Collateral/1N5333B-D.PDF, ComponentLink3Description="Package Specification", ComponentLink3URL=http://www.onsemi.cn/pub_link/Collateral/017AA.PDF, Datasheet=https://drive.google.com/file/d/1Ga-c_Md0AeMcY8wCGBIrhHknR-aAM12m/view?usp=sharing, DatasheetVersion="Rev. 14", Mounting Technology="Through Hole", P Max (W)=5, PackageDescription="2-Pin, Axial Lead, Diameter 3.49 mm", PackageReference=SURMETIC40-2-017AA-01, PackageVersion="Rev. O, 09/2005", Packing="Tape and Reel", PartNumber=1N5347BRLG, Price per piece=16.89, Product URL=https://sharvielectronics.com/product/1n5347b-10v-5-watt-zener-diode-do-35-package/, RoHS=Pb-Free, VZ Typ (V)=10
D17: "Red LED – 0805 SMD Package – 17-21SURC/S530-A3/TR8", Datasheet=https://drive.google.com/file/d/193qGY45iPx2JlzACJk7ZLn2axHlG04VY/view?usp=sharing, Price per piece=2.32, Product URL=https://sharvielectronics.com/product/red-led-0805-smd-package-17-21surc-s530-a3-tr8/
D18 D19: library part CMP-123542-000001-1, "GOOD-ARK 1N4007 General Purpose Rectifier Diode – DO-41 Package", Capacitance=15pF, Forward Current=1A, Manufacturer=Diotec, Max Junction Temp=+175°C, Max Repetitive Reverse Voltage=1000V, Max Surge Forward Current=27A, Peak Reverse Current=5uA, Temperature="-50°C to +175°C", Temperature Range Low=-50°C, Automotive=No, Category=Diode, ComponentLink2Description=Datasheet, ComponentLink2URL=https://datasheet.octopart.com/1N4007-Diotec-datasheet-62346875.pdf, Datasheet=https://sharvielectronics.com/wp-content/uploads/2020/02/1N4007-Diode-Good-Ark.pdf, Device Class L1="Discrete Semiconductors", Device Class L2=Diodes, Device Class L3="Rectifier Diodes", Height=2.8mm, Ipc Land Pattern Name=DIOAD888W100L520D280, Lead Free=Yes, Manufacturer Part Number=1N4007, Octopart=https://octopart.com/1n4007-diotec-4040411, Package=1N4007, Price per piece=1.29, Product URL=https://sharvielectronics.com/product/good-ark-1n4007-general-purpose-rectifier-diode-do-41-package/, Reverse Voltage=1000V, RoHS=TRUE, Temperature Range High=+175°C
J2 J3: library part "4 Pin JST PH-4A", "4 Pin JST PH-4A Straight Male Connector – 2mm Pitch", Datasheet=https://drive.google.com/file/d/1xtnH8dmm313gQd5L_EWqAXCnKwT4okMA/view?usp=sharing, Price per piece=3.55, Product URL=https://sharvielectronics.com/product/4-pin-jst-ph-4a-straight-male-connector-2mm-pitch/
J4 J6 J14: library part XH2.5-2p, "2 Pin JST-XH Male Straight 2515 Connector 2.54mm Pitch", Datasheet=https://sharvielectronics.com/wp-content/uploads/2021/01/XH-Connector.pdf, Price per piece=1.65, Product URL=https://sharvielectronics.com/product/2-pin-jst-xh-male-straight-2515-connector-2-54mm-pitch/
J7 J8 J12 J13: library part "2p 5mm screw terminal", "XY127- 2 Pin Screw Terminal- 5mm Pitch", Datasheet=https://sharvielectronics.com/wp-content/uploads/2023/03/XY127.pdf, Price per piece=6.32, Product URL=https://sharvielectronics.com/product/2-pin-screw-terminal-block-red-5mm-pitch/
J9 J10 J11: library part "3p 5mm screw terminal", "XY127- 3 Pin Screw Terminal- 5mm Pitch", Datasheet=https://sharvielectronics.com/wp-content/uploads/2023/03/XY127.pdf, Price per piece=8.35, Product URL=https://sharvielectronics.com/product/xy127-3-pin-screw-terminal-5mm-pitch/
K7 K8: library part CMP-08822-000056-1, "HF3FF/005-1ZST – 05V 10A SPDT Relay – Hongfa", Coil Current=72mA, Coil Power=360mW, Coil Resistance=70R, Coil Voltage (DC)=5V, Contact Current Rating=16A, Max Operating Temperature=85°C, Min Operating Temperature=-40°C, Package Quantity=100, Power Consumption=400mW, Coil Type=Non-Latching, Contact Material=Tin, Datasheet=https://drive.google.com/file/d/1_hoLs5DHKocXjc-HuLXelOv-fi3k6HGm/view?usp=sharing, Mount="Through Hole", Operate Time=10ms, Packaging=Tray, Price per piece=29.23, Product URL=https://sharvielectronics.com/product/hf3ff-005-1zst-05v-10a-spdt-relay-hongfa/, Relay Type="General Purpose", Release Time=5ms, Series=G5LE-E, Termination="PC Pin", Throw Configuration=SPDT
Q1 Q2 Q3 Q4 Q5 Q6 Q7 Q8 Q9 Q10 Q11 Q12: library part CMP-32901-000262-1, "MOSFET N-CH 200V 50A TO247AC", Case/Package=TO-247, Continuous Drain Current (ID)=50A, Drain to Source Breakdown Voltage=200V, Drain to Source Resistance=40mR, Gate to Source Voltage (Vgs)=20V, Input Capacitance=4.057nF, Max Operating Temperature=175°C, Max Power Dissipation=300W, Min Operating Temperature=-55°C, Threshold Voltage=4V, Drain to Source Voltage (Vdss)=200V, Element Configuration=Single, Halogen Free="Not Halogen Free", Height=0.799inch, Lead Free="Lead Free", Length=0.625inch, Max Dual Supply Voltage=200V, Mount="Through Hole", Number of Pins=3, Packaging=Bulk, Power Dissipation=300W, Price per piece=110.36, Rds On Max=40mR, REACH SVHC="No SVHC", RoHS Compliant=Yes, Turn-Off Delay Time=55ns, Turn-On Delay Time=17ns, Width=0.209inch
  Q4: ComponentLink1Description="Product URL", ComponentLink1URL=https://sharvielectronics.com/product/irfp260npbf-mosfet-200v-50a-n-channel-power-mosfet-to-247-package/, ComponentLink2Description=Datasheet, ComponentLink2URL=https://drive.google.com/file/d/1_dknK1hQ3iHxK7SVbMXCD2-SqB7tXl_1/view?usp=sharing
Q13 Q14 Q15 Q16 Q17 Q18: library part CMP-18400-000015-1, "6N137 – High-Speed Optocoupler-SOP8", Ambient Temperature Range High=+85°C, Ambient Temperature Range Low=-40°C, Forward Current=10mA, Forward Voltage=1.5V, Isolation Voltage=3750Vrms, Manufacturer=Broadcom, Max Supply Voltage=5.5V, Min Supply Voltage=4.5V, Package=0, Reverse Voltage=5V, Temperature="-40°C to +85°C", Automotive=No, Category=Trans, ComponentLink2Description=Datasheet, ComponentLink2URL=https://docs.broadcom.com/docs/AV02-0940EN, Datasheet=https://sharvielectronics.com/wp-content/uploads/2020/11/6n137.pdf, Device Class L1=Optoelectronics, Device Class L2=Optocouplers, Device Class L3=unset, Digikey Description="OPTOISO 3.75KV OPN COLL 8DIP GW", Height=4.455mm, Lead Free=Yes, Manufacturer Part Number=6N137-300E, Mouser Description="High Speed Optocouplers 10 Mb/s 3750Vrms", Octopart=https://octopart.com/6n137-300e-broadcom-71125550, Price per piece=36, Product URL=https://sharvielectronics.com/product/6n137-high-speed-optocoupler-sop8/, RoHS=TRUE, Standoff Height=0.505mm, Temperature Range High=+85°C, Temperature Range Low=-40°C, Turn Off Delay Time=50ns, Turn On Delay Time=48ns
Q19 Q20 Q21 Q22 Q24 Q25: "EL817S1 (B) (TU) – F Optocoupler SMD-4 Cut Tape", Datasheet=https://sharvielectronics.com/wp-content/uploads/2021/09/EL817-Optocoupler.pdf, Price per piece=7.45, Product URL=https://sharvielectronics.com/product/el817s1-b-tu-f-optocoupler-smd-4-cut-tape/
Q23: library part CMP-02550-000182-1, "SI2300DS 30V 3.6A N-Channel Mosfet – SOT-23 Package", Continuous Drain Current=3.1A, Drain to Source Breakdown Voltage=30V, Drain to Source Resistance=0.055Ω, Gate To Source Voltage=12V, Input Capacitace At Vds="320pF @ 15V", Manufacturer=Vishay, Max Forward Diode Voltage=1.2V, Max Junction Temp=+150°C, Package=S-03946, Power Dissipation=1.1W, Pulse Drain Current=15A, Temperature="-55°C to +150°C", Temperature Range Low=-55°C, Typ Forward Diode Voltage=0.8V, Automotive=No, Category=Trans, ComponentLink2Description=Datasheet, ComponentLink2URL=http://www.vishay.com/docs/65701/si2300ds.pdf, Datasheet=https://www.vishay.com/docs/65701/si2300ds.pdf, Depletion Mode=False, Device Class L1="Discrete Semiconductors", Device Class L2=Transistors, Device Class L3=MOSFETs, Digikey Description="MOSFET N-CH 30V 3.6A SOT-23", Drain To Source Voltage=30V, Gate Charge At Vgs="6.5nC @ 10V", Height=1.12mm, Ipc Land Pattern Name=SOT95P237X100-3, Lead Free=Yes, Manufacturer Part Number=SI2300DS-T1-GE3, Mouser Description="MOSFET 30V 3.6A N-CH MOSFET", Number Of Channels=1, Number Of N Channels=1, Octopart=https://octopart.com/si2300ds-t1-ge3-vishay-44451512, Price per piece=12.5, Product URL=https://sharvielectronics.com/product/si2300ds-30v-3-6a-n-channel-mosfet-sot-23-package/, Reverse Recovery Charge=5nC, Reverse Recovery Time=11ns, RoHS=TRUE, Rthja Max=90°C/W, Standoff Height=0.01mm, Temperature Range High=+150°C, Threshold Vgs Max=1.5V, Threshold Vgs Min=0.6V, Transconductance=13S, Turn Off Delay Time=15ns, Turn On Delay Time=5ns
R1 R2 R3 R7 R8 R9 R13 R14 R15 R19 R20 R21: library part 1K_2512, "1K Ohm 1W Resistor 2512 Package", Case Code (Imperial)=2512, Case Code (Metric)=6432, Manufacturer="Vishay Dale", Manufacturer Part Number=CRCW25121R00FKEG, Max Operating Temperature=155°C, Max Power Dissipation=1W, Min Operating Temperature=-55°C, Package Quantity=2000, Resistance=1R, Temperature Coefficient=100ppm/°C, Tolerance=1%, Voltage Rating=500V, Case/Package=2512, ComponentLink1Description="Product URL", ComponentLink1URL=https://sharvielectronics.com/product/1k-ohm-1w-resistor-2512-package-pack-of-5/, ComponentLink2Description=Datasheet, Composition="Thick Film", Contact Plating=Tin, Depth=3.15mm, Features="Automotive AEC-Q200", Height=0.6mm, Lead Free="Lead Free", Length=6.3mm, Military Standard=Not, Mount="Surface Mount", Number of Pins=2, Number of Terminations=2, Packaging="Tape and Reel", Power Rating=1W, Price per piece=3.25, Prie per piece=3.25, Product URL=https://sharvielectronics.com/product/1k-ohm-1w-resistor-2512-package-pack-of-5/, Radiation Hardening=No, REACH SVHC="No SVHC", Termination=SMD/SMT, Voltage Rating (DC)=500V, Weight=0.001429oz, Width=0.124inch
R4 R5 R6 R10 R11 R12 R16 R17 R18 R22 R23 R24 R40 R45 R54 R84 R95 R102 R103 R104 R105 R106 R107 R108 R112 R119 R120 R122 R126 R127 R130: "10K Ohm 1/8 Watt Resistor 1% Tolerance RC0805FR-0710KL – 0805 Package", Datasheet=https://drive.google.com/file/d/1pkLQT_RQ1i35oFQcGREpZr7Oy3Ppi-ZT/view?usp=sharing, Price per piece=0.82, Product URL=https://sharvielectronics.com/product/10k-ohm-1-8-watt-resistor-1-tolerance-rc0805fr-0710kl-0805-package/
R25 R93 R124 R129: library part "1k 0805", "1K Ohm 1/8 Watt Resistor 1% Tolerance 0805S8F1001T5E – 0805 Package", Datasheet=https://drive.google.com/file/d/1rtx85iFJaMrDbsv7PAzG9bTFItPmAE38/view?usp=sharing, Price per piece=0.82, Product URL=https://sharvielectronics.com/product/1k-ohm-1-8-watt-resistor-1-tolerance-0805s8f1001t5e-0805-package/
R26 R27 R28 R29 R30 R31 R32 R33 R38 R39 R41 R42 R43 R44 R46 R59 R60 R61 R65 R66 R67 R68 R69 R70 R71 R72 R73 R77 R78 R79 R80 R81 R82 R83 R87 R91: library part "R0000 0603", "0 Ohm 1/10 Watt Resistor 1% Tolerance RC0603FR-070RL – 0603 Package", Datasheet=https://drive.google.com/file/d/1pkLQT_RQ1i35oFQcGREpZr7Oy3Ppi-ZT/view?usp=sharing, Price per piece=0.97, Product URL=https://sharvielectronics.com/product/0-ohm-1-10-watt-resistor-1-tolerance-rc0603fr-070rl-0603-package/
R34 R52: library part "1W Bleeder"
R35: library part R0805, "3K Ohm 1/8 Watt Resistor 1% Tolerance 0805W8F3001T5E – 0805 Package", Datasheet=https://drive.google.com/file/d/1rtx85iFJaMrDbsv7PAzG9bTFItPmAE38/view?usp=sharing, Price per piece=0.82, Product URL=https://sharvielectronics.com/product/3k-ohm-1-8-watt-resistor-1-tolerance-0805w8f3001t5e-0805-package/
R36: library part R0805, "12K Ohm 1/8 Watt Resistor 1% Tolerance RC0805FR-0712KL – 0805 Package", Datasheet=https://drive.google.com/file/d/1pkLQT_RQ1i35oFQcGREpZr7Oy3Ppi-ZT/view?usp=sharing, Price per piece=0.93, Product URL=https://sharvielectronics.com/product/12k-ohm-1-8-watt-resistor-1-tolerance-rc0805fr-0712kl-0805-package/
R37 R48 R50 R51 R53: library part R0805, "20K ohm 1/8 Watt SMD Resistor 1% Tolerance RC0805FR-0720KL – 0805 Package", Datasheet=https://drive.google.com/file/d/1pkLQT_RQ1i35oFQcGREpZr7Oy3Ppi-ZT/view?usp=sharing, Price per piece=1.15, Product URL=https://sharvielectronics.com/product/20k-ohm-1-8-watt-smd-resistor-1-tolerance-rc0805fr-0720kl-0805-package/
R47 R49: "100 Ohm 1 Watt Resistor 5% Tolerance", Price per piece=2.14, Product URL=https://sharvielectronics.com/product/100-ohm-1-watt-resistor-5-tolerance/
R55 R56: library part R0805, "5.1K Ohm 1/8 Watt Resistor 1% Tolerance 0805S8F5101T5E – 0805 Package", Datasheet=https://drive.google.com/file/d/1rtx85iFJaMrDbsv7PAzG9bTFItPmAE38/view?usp=sharing, Price per piece=1.92, Product URL=https://sharvielectronics.com/product/5-1k-ohm-1-8-watt-resistor-1-tolerance-0805s8f5101t5e-0805-package/
R57 R58: library part R0805, "120 Ohm 1/8 Watt Resistor 1% Tolerance RC0805FR-07120RL – 0805 Package", Datasheet=https://drive.google.com/file/d/1pkLQT_RQ1i35oFQcGREpZr7Oy3Ppi-ZT/view?usp=sharing, Price per piece=0.86, Product URL=https://sharvielectronics.com/product/120-ohm-1-8-watt-resistor-1-tolerance-rc0805fr-07120rl-0805-package/, Variant="62 Ohm 1/8 Watt Resistor 1% Tolerance RC0805FR-0762RL – 0805 Package"
R62 R63 R64 R74 R75 R76: library part R0805-0402, "180 Ohm 1/4 Watt Resistor – 0402 Package", Datasheet=https://sharvielectronics.com/wp-content/uploads/2020/09/smd_Resistor_0603_0805_1206.pdf, Price per piece=0.85, Product URL=https://sharvielectronics.com/product/180-ohm-1-4-watt-resistor-0402-package-pack-of-20/
R85 R90 R94 R100 R101: "100 ohm 1/4W Resistor 0805 Package", Price per piece=0.82, Product URL=https://sharvielectronics.com/product/100-ohm-1-4w-resistor-0805-package/
R86: library part R0805, "510 Ohm 1/8 Watt Resistor 1% Tolerance 0805S8F5100T5E – 0805 Package", Datasheet=https://drive.google.com/file/d/1rtx85iFJaMrDbsv7PAzG9bTFItPmAE38/view, Price per piece=0.85, Product URL=https://sharvielectronics.com/product/510-ohm-1-8-watt-resistor-1-tolerance-0805s8f5100t5e-0805-package/
R89 R92: library part R0805, "200 Ohm 1/8 Watt Resistor 1% Tolerance 0805W8F2000TE – 0805 Package", Datasheet=https://drive.google.com/file/d/1rtx85iFJaMrDbsv7PAzG9bTFItPmAE38/view?usp=sharing, Price per piece=0.82, Product URL=https://sharvielectronics.com/product/200-ohm-1-8-watt-resistor-1-tolerance-0805w8f2000te-0805-package/
R96: library part 10k_10W_THT, "10K ohm 10W Fusible Cement Resistor", Price per piece=20, Product URL=https://sharvielectronics.com/product/10k-ohm-10w-fusible-cement-resistor/
R97 R98 R99: "220 Ohm 1 Watt Resistor 5% Tolerance", Price per piece=1.46, Product URL=https://sharvielectronics.com/product/220-ohm-1-watt-resistor-5-tolerance/
R109 R110 R111 R113 R114 R115 R116 R117 R118 R121 R123 R125 R128 R131: library part R0805, "3.3K Ohm 1/8 Watt Resistor 1% Tolerance RC0805FR-073K3L – 0805 Package", Datasheet=https://drive.google.com/file/d/1pkLQT_RQ1i35oFQcGREpZr7Oy3Ppi-ZT/view?usp=sharing, Price per piece=0.82, Product URL=https://sharvielectronics.com/product/3-3k-ohm-1-8-watt-resistor-1-tolerance-rc0805fr-073k3l-0805-package/
S3: "WCS1600 100A Hall Effect Linear Current Sensor", Datasheet=https://sharvielectronics.com/wp-content/uploads/2020/02/WCS1600.pdf, Price per piece=280.67, Product URL=https://sharvielectronics.com/product/wcs1600-100a-hall-effect-linear-current-sensor/
T1: library part "7701 Keystone Terminal"
U2: library part CMP-32851-000132-1, "IC GATE DRVR HALF-BRIDGE 28SOIC", Case/Package=SOIC, Max Operating Temperature=150°C, Max Output Current=350mA, Max Supply Voltage=20V, Min Operating Temperature=-40°C, Min Supply Voltage=10V, On-State Resistance=100R, Output Voltage=620V, Package Quantity=25, Channel Type=3-Phase, ComponentLink1Description="New link", Fall Time=75ns, Halogen Free="Halogen Free", Height=0.093inch, Lead Free="Lead Free", Length=0.712inch, Mount="Surface Mount", Number Of Channels=6, Number of Drivers=6, Number of Outputs=6, Number of Pins=28, Output Current=350mA, Packaging=Rail/Tube, Price per piece=365, Product URL=https://sharvielectronics.com/product/ir2136-3-phase-bridge-driver/, Propagation Delay=425ns, REACH SVHC="No SVHC", RoHS Compliant=Yes, Series=-, Width=0.299inch
U3: library part CMP-0187-00321-3, "MCP6004 1MHz Rail-to-Rail Operational Amplifier – SOIC-14 Package", Case/Package=SOIC, Input Bias Current=1pA, Input Offset Voltage (Vos)=4.5mV, Max Operating Temperature=85°C, Max Supply Voltage=6V, Min Operating Temperature=-40°C, Min Supply Voltage=1.8V, Nominal Supply Current=100uA, Operating Supply Voltage=5.5V, Output Current=23mA, Package Quantity=57, Power Supply Rejection Ratio (PSRR)=86dB, Voltage Gain=112dB, Amplifier Type="GENERAL PURPOSE", Bandwidth=1MHz, Common Mode Rejection Ratio=60dB, Contact Plating=Tin, Datasheet=https://ww1.microchip.com/downloads/en/DeviceDoc/MCP6001-1R-1U-2-4-1-MHz-Low-Power-Op-Amp-DS20001733L.pdf, Gain Bandwidth Product=1MHz, Height=1.25mm, Input Offset Voltage-Max=4.5mV, Lead Free="Lead Free", Length=8.65mm, Mount="Surface Mount", Number of Amplifiers=4, Number Of Channels=4, Number of Circuits=4, Number of Elements=4, Number of Pins=14, Packaging=Rail/Tube, Price per piece=38.45, Product URL=https://sharvielectronics.com/product/mcp6004-1mhz-rail-to-rail-operational-amplifier-soic-14-package/, Radiation Hardening=No, REACH SVHC="No SVHC", RoHS Compliant=Yes, Slew Rate=0.6V/µs, Slew Rate-Nom=0.6V/µs, Supply Current=100uA, Technology=CMOS, Unity Gain Bandwidth Product=1MHz, Width=3.9mm
U4: library part CMP-0244-00483-1, "Positive Voltage Regulator, 5V, 3-Pin TO-220", ComponentLink1Description="Manufacturer URL", ComponentLink1URL=http://www.st.com, ComponentLink2Description=Datasheet, ComponentLink2URL=http://www.st.com/internet/com/TECHNICAL_RESOURCES/TECHNICAL_LITERATURE/DATASHEET/CD00000444.pdf, ComponentLink3Description="Package Specification", ComponentLink3URL=http://www.st.com/internet/com/TECHNICAL_RESOURCES/TECHNICAL_LITERATURE/PACKAGE_INFORMATION/CD00004649.pdf, DatasheetVersion=16/11/2011, PackageDescription="TO, Thru-Hole, Vertical, Heatsink Mounted; 3 In-Line Leads; Pitch 2.54 mm", PackageReference=TO220, PackageVersion=ver3.0
U5: library part CMP-06276-000139-1, "IC MCU 8BIT 4KB FLASH 8SOIC", Case/Package=SOIC, Frequency=20MHz, Max Operating Temperature=105°C, Min Operating Temperature=-40°C, Core Architecture=AVR, Interface=I2C, Memory Size=4KB, Memory Type=FLASH, Number of I/Os=6, Number of Pins=8, Oscillator Type=Internal, Packaging="Tape and Reel", Peripherals="Brown-out Detect/Reset", RoHS Compliant=Yes
U6 U7: "TP8485E – RS485 Transceiver Interface IC SOIC-8 Package", Datasheet=https://drive.google.com/file/d/1U_aS4Uf2IPB18ZIqPadQc-TMP5dizR4y/view?usp=sharing, Price per piece=28.94, Product URL=https://sharvielectronics.com/product/tp8485e-rs485-transceiver-interface-ic-soic-8-package/
U8: library part CMP-0244-00387-1, "78L12 – 12V 150mA Positive Voltage Regulator-SOT-89 Package", ComponentLink1Description="Manufacturer URL", ComponentLink1URL=http://www.st.com, ComponentLink2Description=Datasheet, ComponentLink2URL=http://www.st.com/internet/com/TECHNICAL_RESOURCES/TECHNICAL_LITERATURE/DATASHEET/CD00000446.pdf, Datasheet=https://drive.google.com/file/d/1zOSy_FqMAdv1iXKmyJwn0G3RjMYeVW2a/view?usp=sharing, DatasheetVersion=1/02/2011, PackageDescription="3-Pin SOT-89 Package 1.5 mm Pitch, 4.1 mm Lead Span", PackageReference=SOT-89, PackageVersion=2011, Price per piece=13.32, Product URL=https://sharvielectronics.com/product/78l12-12v-150ma-positive-voltage-regulator-sot-89-package/
U9: "MINI560 5VDC 5A Step-Down Stabilized Module", Price per piece=125.33, Product URL=https://sharvielectronics.com/product/mini560-5vdc-5a-step-down-stabilized-module/
VR3: library part CMP-2000-05078-1, "10K ohm Variable Resistor-Trimpot 3296 Package", Manufacturer=Bourns, Operating Temperature Range=-55Cto+125C, Package Description="3-Pin Surface Mount Device, Body 9.53 x 6.1 mm, Pitch 2.54 mm", Package Reference=3299W, Power Rating=500mW(1/2W), Resistance=10kOhms, Temperature Coefficient=100PPM/C, Tolerance=10%, Voltage Rating=300V, Adjustment=TopCrossed, Brand=Bourns, Datasheet=https://sharvielectronics.com/wp-content/uploads/2020/06/50K-ohm-Variable-Resistor-Trimpot-3296-Package.pdf, Datasheet URL=https://datasheet.ciiva.com/19482/769696-19482212.pdf, Datasheet Version=Sep-04, Element Type=Cermet, Length=10.03mm, Manufacturer URL=http://www.bourns.com/, Mounting=PanelMount, Packaging=Tube, Price per piece=11.23, Product=Multiturn, Product Category=TrimmerResistors-ThroughHole, Product Type=SquareTrimmingPotentiometer, Product URL=https://sharvielectronics.com/product/10k-ohm-variable-resistor-trimpot-3296-package/, Qualification=Commercial, RoHS=True, Series=3299, Taper=Linear, Termination Style=Pin, Tradename=Trimpot, Type=Trimmers, Unit Weight=0.035000oz, Width=9.53mm

## Free pads (board coordinates)
  round 5 hole 3.2: 1(5,5) 1(5,75) 1(5,145) 1(95.504,5) 1(97.409,145) 1(292,5) 1(292,145)